# Altium PCB Final_PCBDesign_HY.PcbDoc (part 2 of 2)
Units mil, origin at the board's own origin, x right, y up, seen from the top; angles counter-clockwise.
Board outline 6000 x 4000 mil, 2 copper layers (Top Layer, Bottom Layer); 11 components, 10 nets, 55 pads, 2 vias.
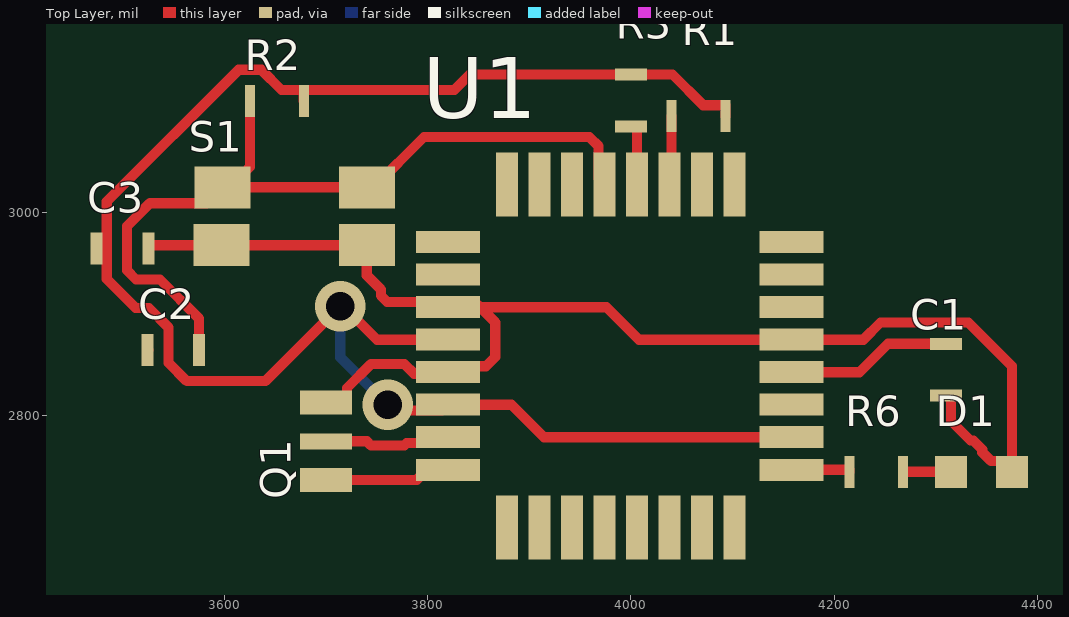
[diagram p0: Top Layer view]

## Via types
v1: diameter 50, hole 28, Top Layer to Bottom Layer, 2 vias

## Nets (pads, with @x,y where several pads share a name; then routed paths per layer and width w, separated by ;. In a path a pad name is that pad's centre, name@x,y a point inside that pad or via, vN(x,y) a via of type N, cw(c..) or ccw(c..) an arc to the next point about the centre after c; other vN are vias at no path point) (continued)
GND: (continued)
  Top Layer w10: C3.1 3525,2967.09 3525.91,2968 S1.2 S1.3 3740,2938.39 3753.83,2924.56 3753.83,2918.5 3760.15,2912.19 3846.35,2912.19 3851.54,2907 ; Q1.3 3720.59,2813 3720.59,2827.51 3744.02,2850.94 3777.16,2850.94 3786.56,2841.54 3818.54,2841.54 U1.5 3825.83,2848.83 3857.36,2848.83 3866.5,2857.96 3866.5,2892.04 3851.54,2907 ; U1.3 3851.54,2907 ; C1.0 4314.14,2820 4315.05,2819.09 4315.05,2794.95 4334.25,2775.75 4336.96,2775.75 4345.75,2766.96 4345.75,2764.25 4354.25,2755.75 4364.25,2755.75 D1.1 4375,2755.75 4375,2848.87 4331.96,2891.91 4245.58,2891.91 4228.68,2875 U1.21 4007.91,2875 3975.91,2907 3851.54,2907
NetC1_1: C1.1 U1.20 | length 163.6
  Top Layer w10: U1.20 4224.96,2843 4252.96,2871 C1.1
NetC2_1: C2.1 R2.0 S1.0 S1.1 U1.29 | length 795.5
  Top Layer w10: C2.1 3575,2895.75 3536.5,2934.25 3512.88,2934.25 3504.09,2943.04 3504.09,2986.96 3526.46,3009.33 3582.33,3009.33 S1.0 ; R2.0 3625,3045.11 3604.89,3025 S1.1 3746.89,3025 3796.39,3074.5 3959.04,3074.5 3968.17,3065.36 3968.17,3033.83 U1.29
NetD1_0: D1.0 R6.1 | length 47
  Top Layer w10: R6.1 D1.0
NetQ1_1: Q1.1 U1.8 | length 124.1
  Top Layer w10: Q1.1 3789.33,2737 3799.33,2747 U1.8
NetQ1_2: Q1.2 U1.7 | length 125
  Top Layer w10: Q1.2 3739.96,2775 3744.02,2770.94 3777.16,2770.94 3779.39,2773.17 3814.17,2773.17 U1.7
NetR1_0: R1.0 U1.27 | length 67.8
  Top Layer w10: U1.27 4039.92,3029.92 4039.92,3094.92 R1.0
NetR3_0: R3.0 U1.28 | length 59.1
  Top Layer w10: R3.0 4005.09,3085 4006,3084.09 4006,3039.65 U1.28@4000.17,3033.83
NetR6_0: R6.0 U1.17 | length 59
  Top Layer w10: U1.17 4214.92,2747 4215,2746.92 R6.0
VCC: C3.0 R1.1 R2.1 R3.1 U1.4 U1.6 U1.18 | length 1768
  Top Layer w10: R2.1 R2.1@3678,3120.67 ; v1(3760.59,2810.94) 3760.59,2808.8 3769.39,2800 3770,2800 3775.17,2805.17 3814.17,2805.17 U1.6 3882.43,2811 3914.43,2779 U1.18 ; U1.4 3750,2875 3720,2905 3715,2905 3713.83,2906.17 v1(3713.83,2907.99) 3640.09,2834.25 3562.88,2834.25 3545,2852.13 3545,2886.87 3525.6,2906.26 3512.59,2906.26 3484.09,2934.75 3484.09,3010.98 3613.87,3140.75 3636.13,3140.75 3656.13,3120.75 3677.92,3120.75 R2.1@3678,3120.67 ; R1.1 4093,3105.67 4092.92,3105.75 4071.13,3105.75 4040.88,3136 R3.1 3841.29,3136 3826.04,3120.75 3678.08,3120.75 R2.1@3678,3120.67
  Bottom Layer w10: v1(3713.83,2907.99) 3713.83,2857.7 v1(3760.59,2810.94)
pads on no net: C2.0 U1.1 U1.2 U1.9 U1.10 U1.11 U1.12 U1.13 U1.14 U1.15 U1.16 U1.19 U1.22 U1.23 U1.24 U1.25 U1.26 U1.30 U1.31 U1.32
copper on no net: | length 1
  Top Layer w10: 3524,2865 3525,2865